# Altium PCB hat_template 2021V3.PcbDoc (part 1 of 2)
Units mm, origin at the board's own origin, x right, y up, seen from the top; angles counter-clockwise.
Board outline 64 x 85 mm, 4 copper layers (Top Side, Ground Plane, Power Plane, Bottom Side), stack 0.844 mm thick; 109 components, 93 nets, 378 pads, 126 vias.
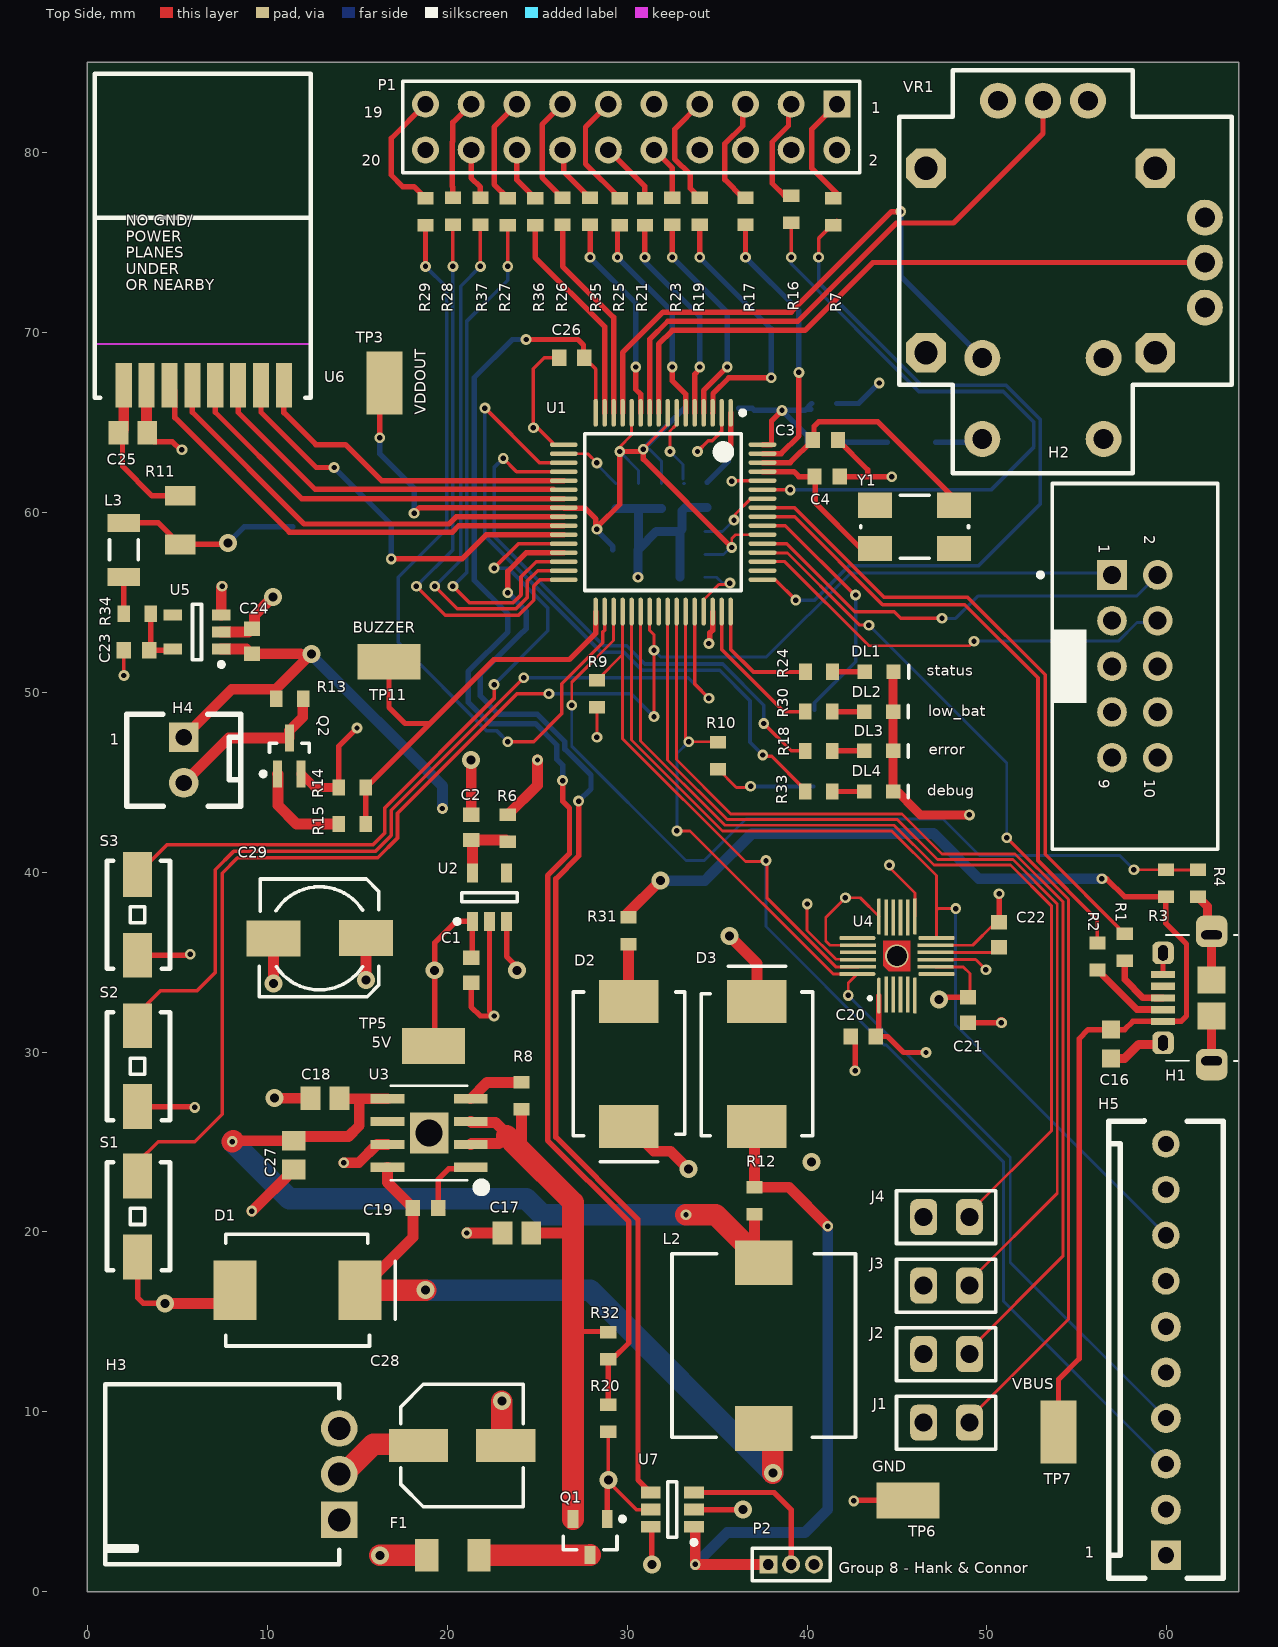
[diagram p0: Top Side view]
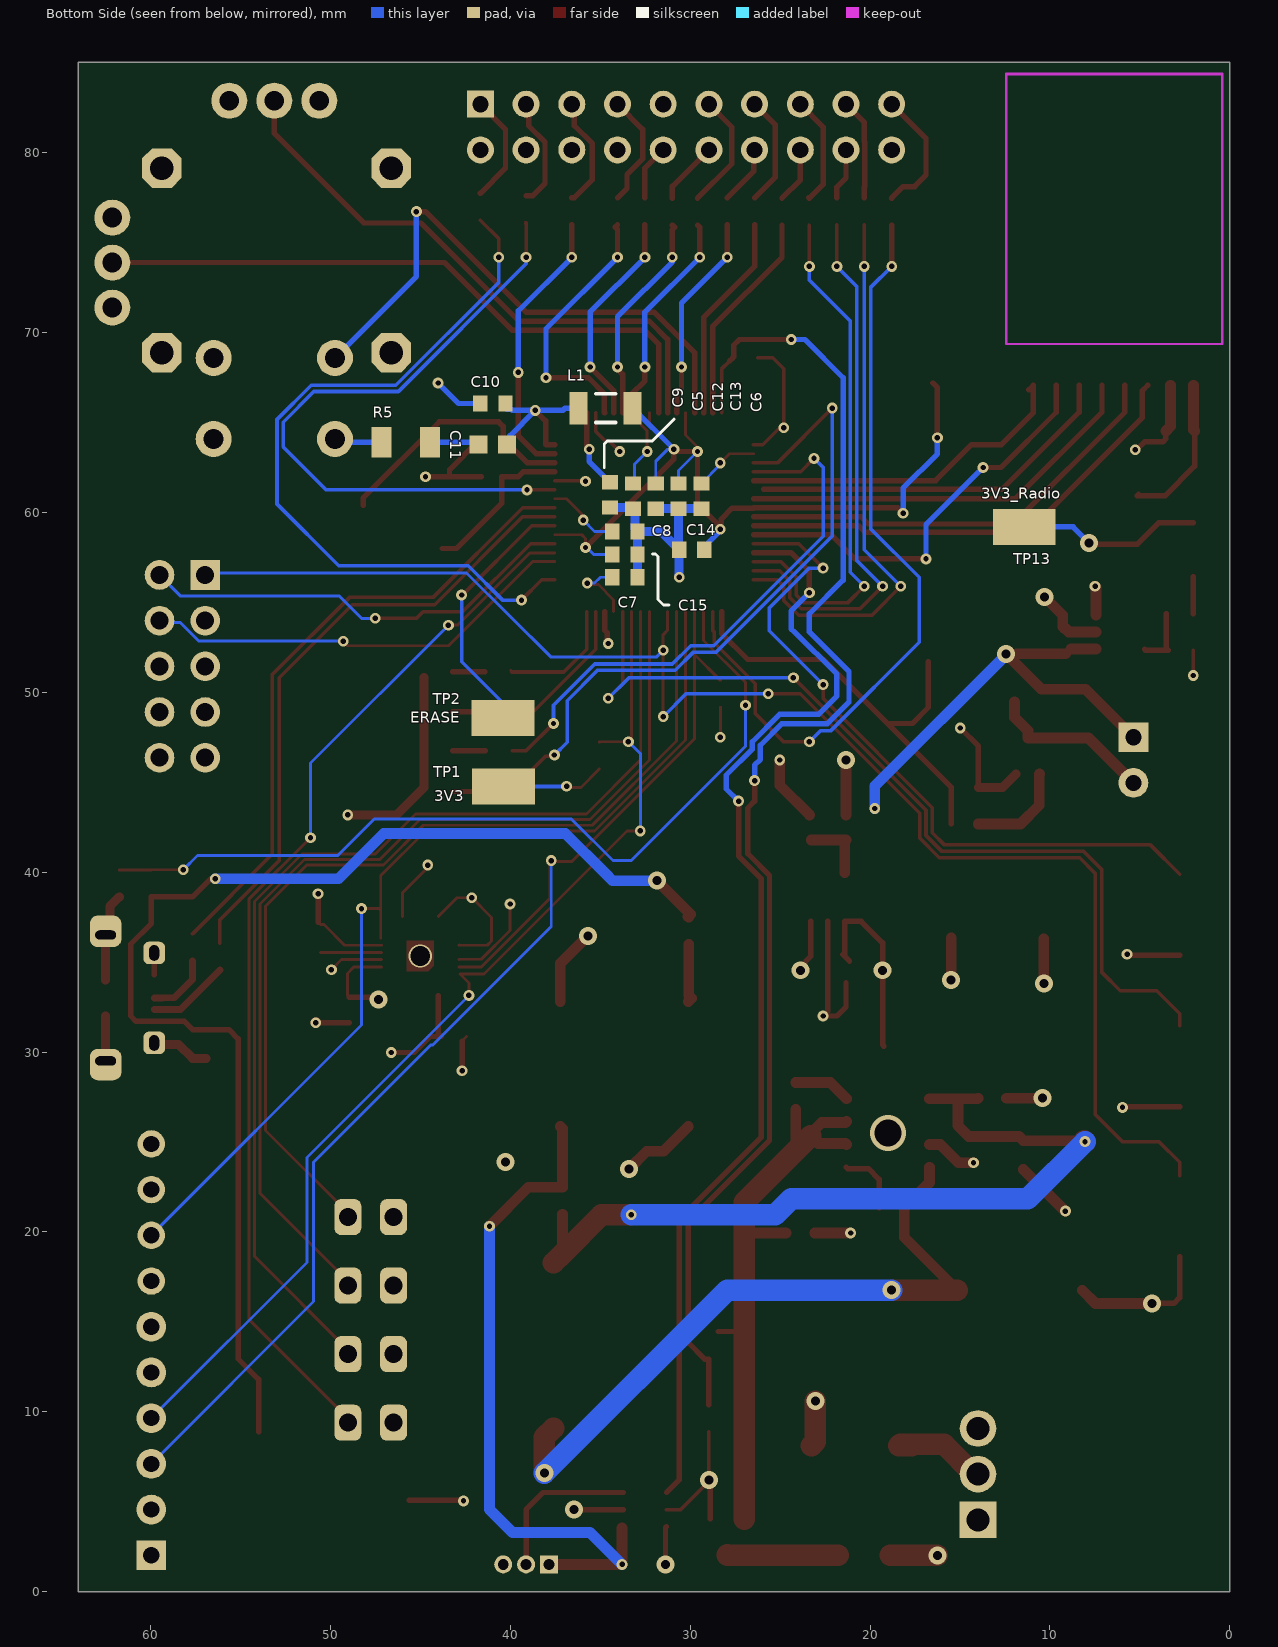
[diagram p1: Bottom Side view, seen from below]
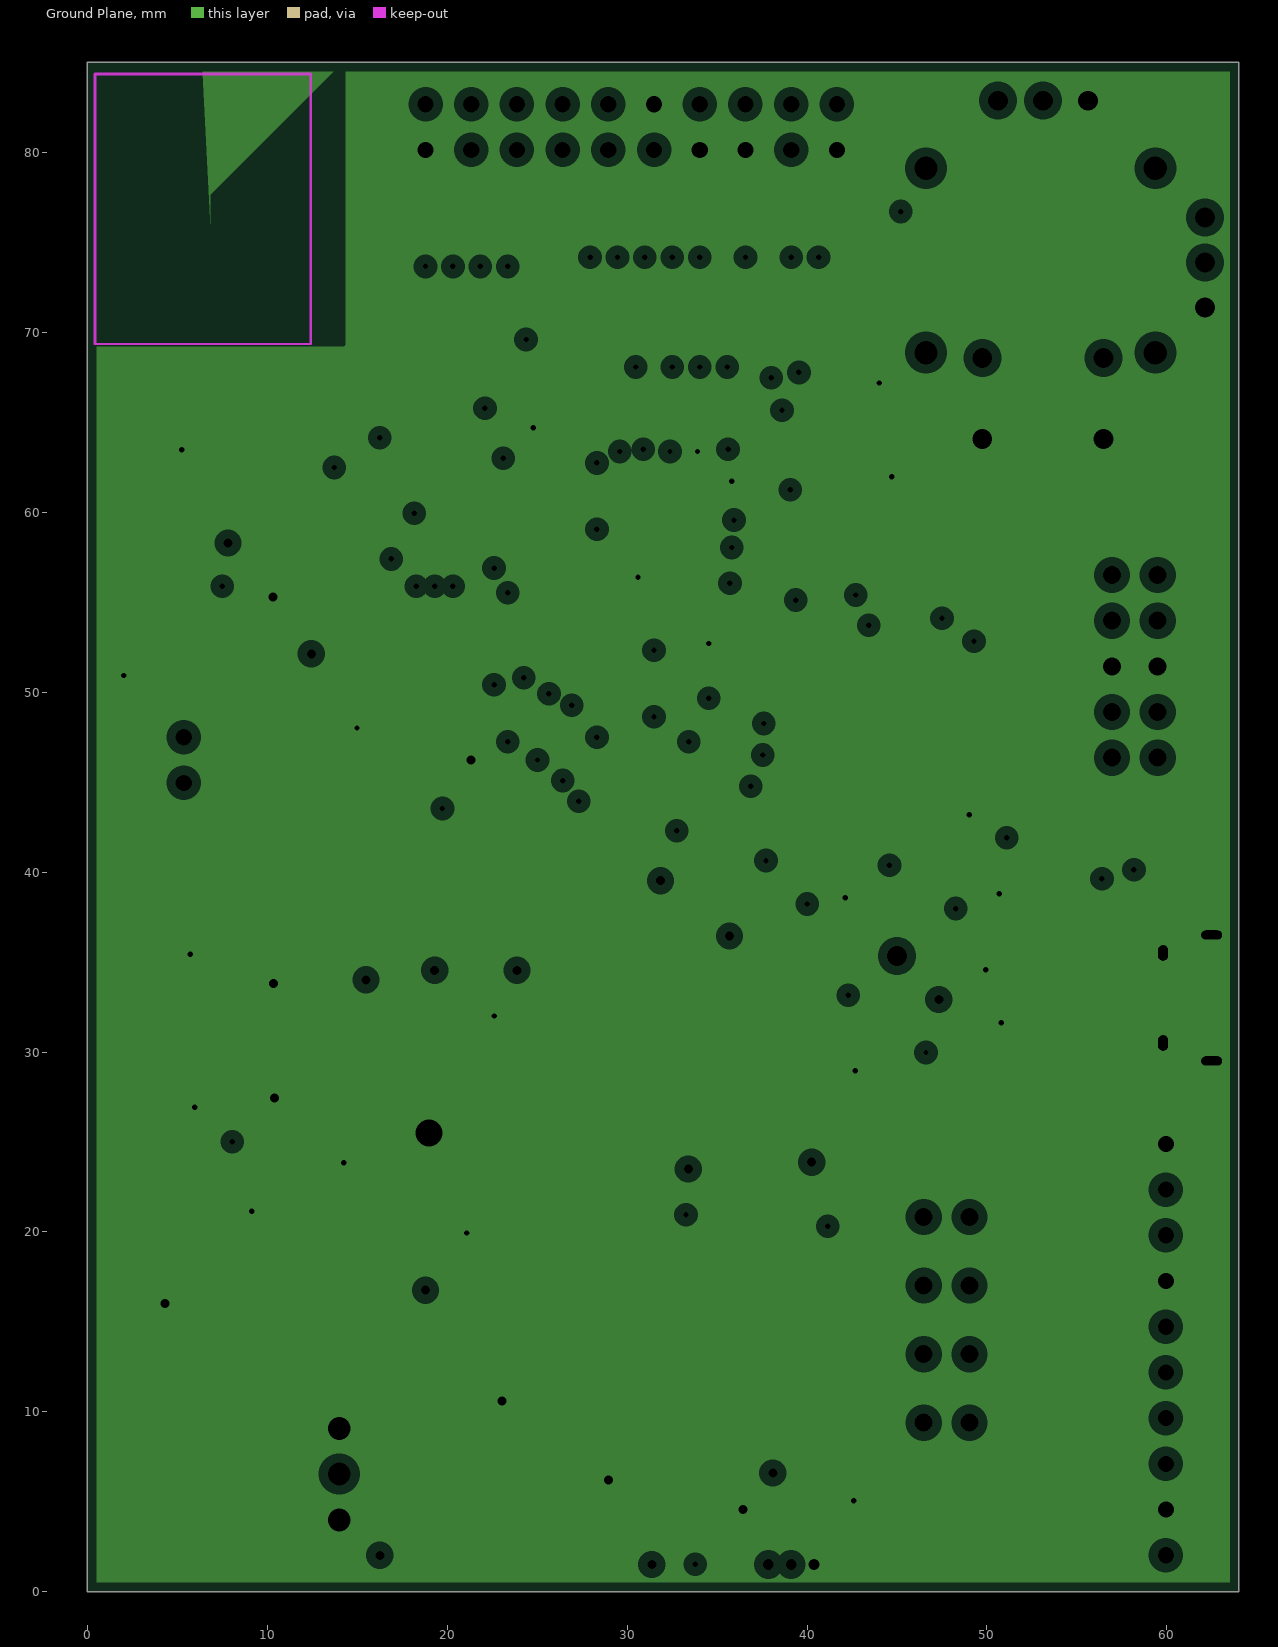
[diagram p2: Ground Plane, clearances drawn from the general rule]
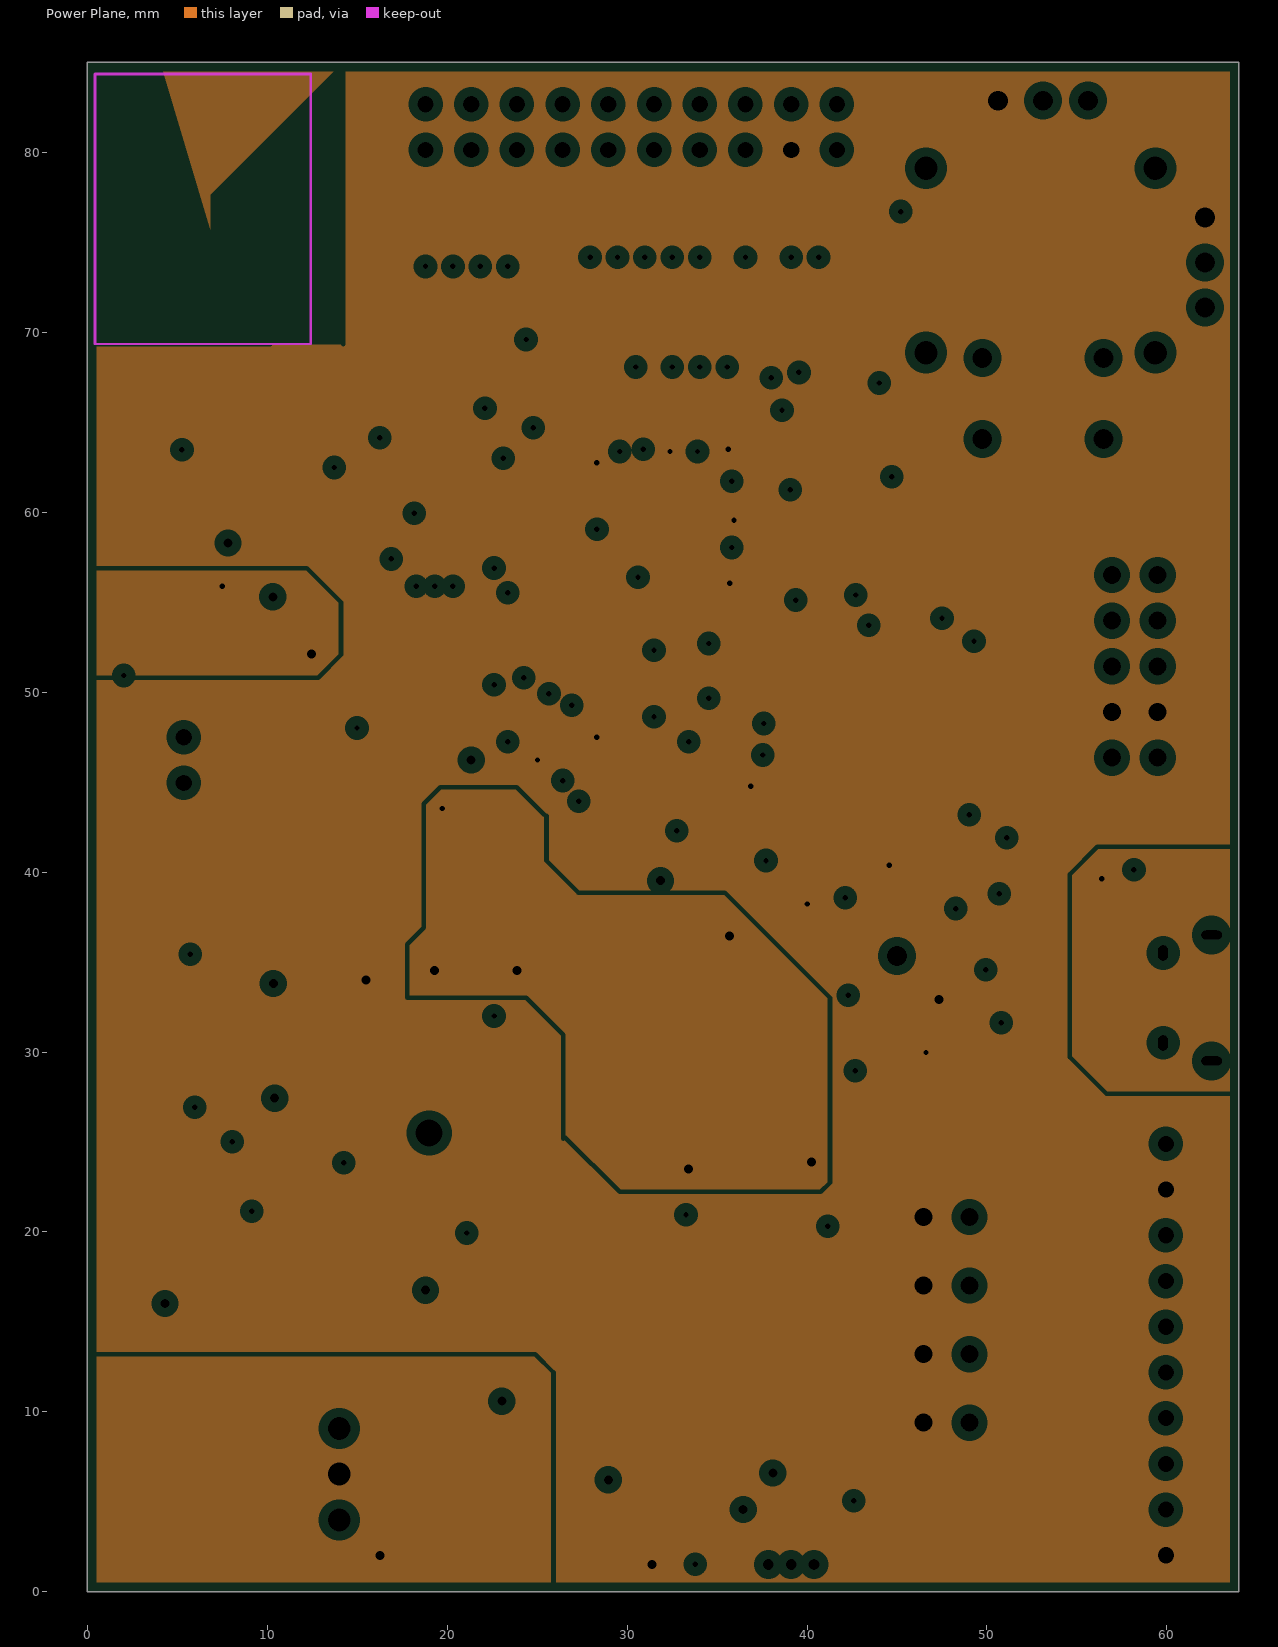
[diagram p3: Power Plane, clearances drawn from the general rule]

## Layer stack, top to bottom
Top Solder: solder mask 0.0102, Solder Resist, Dk 3.5
Top Side: signal copper 0.0356
Dielectric 1: core 0.32, FR-4, Dk 4.8
Ground Plane: plane copper 0.036, net GND
Dielectric 3: prepreg 0.127, Dk 4.2
Power Plane: plane copper 0.036, net (Multiple Nets)
Dielectric 4: core 0.254, Dk 4.2
Bottom Side: signal copper 0.0356
Bottom Solder: solder mask 0.0102, Solder Resist, Dk 3.5

## Board outline
0,85 64,85 64,0 0,0 0,85

## Design rules (kind name [scope] priority, off if disabled: settings)
BoardOutlineClearance [All] p1: gap=0.5 ignorepadtopadclearanceinfootprint=FALSE
Clearance Min_Clearance_Circuit_Labs [All] p1: gap=0.15 ignorepadtopadclearanceinfootprint=FALSE except(0: Arc-Hole Track-Hole SMDPad-Hole THPad-Hole Via-Hole Fill-Hole Poly-Hole Region-Hole Text-Hole)
DiffPairsRouting [All] p1: maxlimit=0.254 minlimit=0.254 mostfreqgap=0.254 toplayer_minwidth=0.381 toplayer_maxwidth=0.381 toplayer_prefwidth=0.381 bottomlayer_minwidth=0.381 bottomlayer_maxwidth=0.381 bottomlayer_prefwidth=0.381 maxuncoupledlength=12.7
FanoutControl Fanout_BGA [IsBGA] p1 off: bgadir=Out bgaviamode=Centered fanoutstyle=Auto fanoutdirection=Alternating viagrid=0.025 // Fanout_BGA (Default Rule)
HoleSize [All] p1: absolutevalues=TRUE maxlimit=10 minlimit=0.3 maxpercent=80.000 minpercent=20.000
MinimumAnnularRing [All] p1: minimumring=0.1
MinimumSolderMaskSliver [All] p1: minsoldermaskwidth=0.1
NetAntennae [All] p1: netantennaetolerance=1
PasteMaskExpansion [All] p1 off: expansion=0.2
PlaneClearance [All] p1: clearance=0.508
PlaneConnect [All] p1: planeconnectstyle=Relief reliefexpansion=0.508 reliefentries=4 reliefconductorwidth=0.254 reliefairgap=0.254
PolygonConnect [All] p1: connectstyle=Relief reliefconductorwidth=0.254 reliefentries=4 polygonreliefangle="90 Angle" airgapwidth=0.254
RoutingVias [All] p1: holewidth=0.5 width=1 viastyle="Through Hole" minholewidth=0.3 minwidth=0.6 maxholewidth=1 maxwidth=2
SMDNeckDown [All] p1 off: percent=50.000
SMDToCorner [All] p1: distance=98425
SMDToPlane [All] p1: distance=1968504
SilkToSolderMaskClearance SilkscreenOverComponentPads [IsPad] p1: minsilkscreentomaskgap=0.254 clearancetoexposedcopper=TRUE
SolderMaskExpansion [All] p1: expansion=0.102
ViasUnderSMD [All] p1: allowed=FALSE
Width [All] p1: maxlimit=2 minlimit=0.15 preferedwidth=0.3
21 further rules are at their usual default settings.

## Classes and differential pairs
component class Radio: C23 C24 C25 J1 J2 J3 J4 L3 R11 R34 TP13 U5 U6
component class Power: C17 C18 C19 C26 C27 C28 D1 D2 D3 F1 H3 L2 Q1 R8 R12 R20 R31 R32 U3
component class MCU: C1 C2 C3 C4 C5 C6 C7 C8 C9 C10 C11 C12 C13 C14 C15 C16 C29 DL1 DL2 DL3 DL4 H1 H2 L1 P1 R1 R2 R3 R4 R5 R6 R7 R9 R10 R16 R17 R18 R19 R21 R23 R24 R25 R26 R27 R28 R29 R30 R33 R35 R36 R37 S1 S2 S3 TP1 TP2 TP3 TP5 TP6 TP7 U1 U2 Y1
component class joystick: VR1
component class IMU: C20 C21 C22 H5 U4
component class buzzer: H4 P2 Q2 R13 R14 R15 TP11 U7
differential pair D: +D_P -D_N

## Components (designator, comment, footprint, x,y, rotation, side; value= is the part's Value field where it differs from the comment)
C1 "1uF" CAPC1608L 21.336,34.544 r90 top
C2 "1uF" CAPC1608L 21.336,42.48 r270 top
C3 "27pF" CAPC1608L 41.021,64.008 r180 top
C4 "27pF" CAPC1608L 41.111,61.976 r180 top
C5 "100nF" CAPC1608L 33.179,60.898 r90 bottom
C6 "100nF" CAPC1608L 29.369,60.898 r90 bottom
C7 "100nF" CAPC1608L 33.625,56.388 r0 bottom
C8 "100nF" CAPC1608L 33.625,58.928 r0 bottom
C9 "100nF" CAPC1608L 34.449,60.96 r90 bottom
C10 "100nF" CAPC1608L 40.959,66.04 r180 bottom
C11 "4.7uF" CAPC1608N 40.969,63.754 r180 bottom
C12 "100nF" CAPC1608L 31.909,60.898 r270 bottom
C13 "100nF" CAPC1608L 30.639,60.898 r270 bottom
C14 "100nF" CAPC1608L 29.91,57.912 r0 bottom
C15 "100nF" CAPC1608L 33.625,57.658 r180 bottom
C16 "4.7uF" CAPC1608N 56.896,30.442 r90 top
C17 "10uF" CAPC2012L 23.876,19.939 r0 top
C18 "33uF" CAPC2012L 13.208,27.432 r0 top
C19 "100nF" CAPC1608L 18.796,21.336 r180 top
C20 "100nF" CAPC1608L 43.118,30.861 r180 top
C21 "10nF" CAPC1608L 48.946,32.334 r270 top
C22 "100nF" CAPC1608L 50.673,36.514 r90 top
C23 "1uF" CAPC1608L 2.732,52.324 r0 top
C24 "1uF" CAPC1608L 9.144,52.832 r270 top
C25 "10uF" CAPC2012L 2.527,64.414 r180 top
C26 "1uF" CAPC1608L 26.924,68.58 r0 top
C27 "33uF" CAPC2012L 11.481,24.27 r90 top
C28 "100µF/25V" CAPAE6666X77M 20.828,8.128 r0 top
C29 "100uF/16V" NICH-1 12.903,36.322 r0 top
D1 "VS-30BQ015-M3/9AT" SMC 11.684,16.764 r0 top
D2 "VS-30BQ015-M3/9AT" SMC 30.099,29.337 r270 top
D3 "VS-30BQ015-M3/9AT" SMC 37.211,29.337 r90 top
DL1 "Bright Green" WL-SMCW0603 44.805,51.13 r180 top
DL2 "Yellow" WL-SMCW0603 44.78,48.92 r180 top
DL3 "Red" WL-SMCW0603 44.78,46.736 r180 top
DL4 "Blue" WL-SMCW0603 44.78,44.475 r180 top
F1 "5A" RESC3216N 20.32,2.032 r0 top
H1 "JS_USB_MICRO_B" FCI_USB_10118194-0001LF 63.934,33.004 r90 top
H2 "Header 5X2 Vert" IDC2.54-V10D 58.217,51.435 r270 top
H3 "Battery_HEADER_3pin" BATT_HEADER_3POS 14,6.54 r90 top
H4 "2 Pin Molex KK HDR" MOLEX_KK_2_HDR 5.359,47.498 r270 top
H5 "10 Pin Molex KK Hdr" MOLEX_KK_10_HDR 59.944,2.032 r90 top
J1 "100Mil Jumper" JMP2.54 49.026,9.398 r180 top
J2 "100Mil Jumper" JMP2.54 49.026,13.208 r180 top
J3 "100Mil Jumper" JMP2.54 49.026,17.018 r180 top
J4 "100Mil Jumper" JMP2.54 49.026,20.828 r180 top
L1 "1A max, Idc 0.3R," INDC3216L 34.695,65.786 r180 bottom
L2 "IND 5.2UH 6A" INDUCTOR5u2 37.592,13.688 r90 top
L3 "1A max, Idc 0.3R," INDC3216L 2.032,57.912 r90 top
P1 "Header 10X2" HDR2X10 41.656,82.677 r180 top
P2 "LED Strip" MHDR1X3 37.846,1.524 r0 top
Q1 "SSM3J328R,LF" SOT23_L 27.94,3.048 r270 top
Q2 "BC817W" SOT323_M 11.227,46.457 r90 top
R1 "27R" RESC1608L 57.658,35.814 r90 top
R2 "27R" RESC1608L 56.134,35.306 r90 top
R3 "27K" RESC1608L 59.944,39.37 r270 top
R4 "47K" RESC1608L 61.722,39.37 r90 top
R5 "1R" RESC3216L 45.8,63.881 r180 bottom
R6 "0R" RESC1608L 23.368,42.43 r90 top
R7 "Value: 750R" RESC1608L 41.453,76.696 r90 top value=750R
R8 "100K" RESC1608L 24.13,27.559 r90 top
R9 "4K7" RESC1608L 28.321,49.911 r270 top
R10 "4K7" RESC1608L 35.052,46.47 r270 top
R11 "1R" RESC3216L 5.156,59.563 r270 top
R12 "0R" RESC1608L 37.084,21.729 r90 top
R13 "10K" RESC1608L 11.252,49.632 r180 top
R14 "10K" RESC1608L 14.732,44.704 r0 top
R15 "10R" RESC1608L 14.732,42.672 r180 top
R16 "Value: 750R" RESC1608L 39.116,76.847 r90 top value=750R
R17 "Value: 750R" RESC1608L 36.576,76.72 r90 top value=750R
R18 "1K" RESC1608L 40.64,46.736 r0 top
R19 "=Value" RESC1608L 34.036,76.72 r90 top
R20 "56K" RESC1608L 28.956,9.652 r90 top
R21 "Value: 750R" RESC1608L 30.988,76.708 r270 top value=750R
R23 "Value: 750R" RESC1608L 32.512,76.72 r270 top value=750R
R24 "1K" RESC1608L 40.665,51.13 r0 top
R25 "Value: 750R" RESC1608L 29.591,76.708 r90 top value=750R
R26 "Value: 750R" RESC1608L 26.416,76.72 r90 top value=750R
R27 "Value: 750R" RESC1608L 23.368,76.708 r90 top value=750R
R28 "Value: 750R" RESC1608L 20.32,76.72 r90 top value=750R
R29 "Value: 750R" RESC1608L 18.796,76.708 r90 top value=750R
R30 "1K" RESC1608L 40.64,48.92 r0 top
R31 "0R" RESC1608L 30.074,36.742 r270 top
R32 "100K" RESC1608L 28.956,13.683 r90 top
R33 "1K" RESC1608L 40.64,44.475 r0 top
R34 "0R" RESC1608L 2.782,54.356 r180 top
R35 "Value: 750R" RESC1608L 27.94,76.72 r270 top value=750R
R36 "Value: 750R" RESC1608L 24.892,76.708 r270 top value=750R
R37 "Value: 750R" RESC1608L 21.844,76.72 r270 top value=750R
S1 "EVQPNF05M" EVQPNF05M 2.794,20.864 r270 top
S2 "EVQPNF05M" EVQPNF05M 2.794,29.21 r270 top
S3 "EVQPNF05M" EVQPNF05M 2.794,37.628 r270 top
TP1 "3V3" TP_1206 40.361,44.755 r180 bottom value=TP
TP2 "Erase" TP_1206 40.411,48.565 r180 bottom value=TP
TP3 "VDDOUT" TP_1206 16.51,67.183 r90 top value=TP
TP5 "5V" TP_1206 19.228,30.328 r0 top value=TP
TP6 "GND" TP_1206 45.618,5.08 r0 top value=TP
TP7 "VBUS" TP_1206 53.975,8.89 r90 top value=TP
TP11 "BUZZER" TP_1206 16.764,51.689 r0 top value=TP
TP13 "3V3_RADIO" TP_1206 11.43,59.182 r180 bottom value=TP
U1 "ATSAM4S8BA-ANR" LQFP64_L 32,60 r270 top locked
U2 "CAT6219-330TDGT3" SOT95P280X145-5N 22.352,38.608 r90 top
U3 "ADP2302ARDZ-5.0 BUCK" RD_8_1 19,25.5 r180 top locked value=Value
U4 "MPU-9250" QUAD24 43.993,33.985 r90 top locked
U5 "CAT6219-330TDGT3" SOT95P280X145-5N 6.096,53.34 r180 top
U6 "nRF24 SMD" NRF24 0.423,66.356 r0 top
U7 "SN74LVC1T45" SOT23-6_N 32.512,4.572 r180 top
VR1 "Joystick 10k with Sw" Joystick_Sw 53.11,82.871 r90 top
Y1 "12MHz" 6.0X3.5-4 45.974,59.182 r0 top

## Footprints (in the part's own frame and the unit in brackets; to place one, negate y for a bottom-side part, rotate by r counter-clockwise, add the part's x,y. Pads: shape width x height; smd on the part's side, far side on the other; paste and mask are expansions set on the pad)
6.0X3.5-4 [mm] "4 SMD 6.0X3.5 mm No Lead Crystal"
  rect 1.9x1.4 smd: 1(-2.2,-1.2) 2(2.2,-1.2) 3(2.2,1.2) 4(-2.2,1.2)
  silkscreen extent -3,-1.75 3,1.75, body extent -3,-1.75 3,1.75, height 1.2
BATT_HEADER_3POS [mil]
  rect 80x80 hole 50: 1(-100,0)
  round 80 hole 50: 2(0,0) 3(100,0)
  silkscreen extent -197,0 197,512
CAPAE6666X77M [mm] "Aluminum Electrolytic Capacitor, Body 6.60x6.60x7.70mm, IPC Low Density"
  rect 3.3x1.85 smd: 1(2.425,0) 2(-2.425,0)
  silkscreen extent -3.4,-3.4 3.4,3.4, body extent -3.4,-3.4 3.4,3.4, height 7.7
CAPC1608L [mm] "Chip Capacitor, Body 1.6x0.8mm, IPC High Density"
  rect 0.8x0.9 smd: 1(-0.7,0) 2(0.7,0)
  body extent -0.87,-0.48 0.87,0.48, height 0.85
CAPC1608N [mm] "Chip Capacitor, Body 1.6x0.8mm, IPC Medium Density"
  rect 1x1 smd: 1(-0.8,0) 2(0.8,0)
  body extent -0.87,-0.48 0.87,0.48, height 0.85
CAPC2012L [mm] "Chip Capacitor, Body 2.0x1.3mm, IPC High Density"
  rect 1.1x1.3 smd: 1(-0.8,0) 2(0.8,0)
  body extent -1.1,-0.72 1.1,0.72, height 1.1
EVQPNF05M [mm] "Panansonic light touch SMD push button switch"
  rect 2.5x1.6 smd: 1(-2.25,0) 2(2.25,0)
  silkscreen extent -3,-1.7 3,1.8, body extent -3,-1.7 3,1.8, height 5
FCI_USB_10118194-0001LF [mm] "Micro USB B Type Receptacle"
  rect 0.4x1.35 smd mask+0.07: 1(-1.3,4.15) 2(-0.65,4.15) 3(0,4.15) 4(0.65,4.15) 5(1.3,4.15)
  rrect50% 1.75x1.75 hole 0.5 slot 1.15 at 90 deg copper offset -0.2,0 paste+0 mask+0.1: 6(-3.5,1.45)
  rrect50% 1.25x1.2 hole 0.55 slot 0.85 at 0 deg: 6(-2.5,4.15) 6(2.5,4.15)
  rect 1.5x1.55 smd: 6(-1,1.45) 6(1,1.45)
  rrect50% 1.75x1.75 hole 0.5 slot 1.15 at 90 deg copper offset 0.2,0 paste+0 mask+0.1: 6(3.5,1.45)
  silkscreen extent -3.5,0 3.5,4
HDR2X10 [mm] "Connector; Header; 10x2 Position"
  rect 1.5x1.5 hole 0.9: 1(0,0)
  round 1.5 hole 0.9: 2(0,2.54) 3(2.54,0) 4(2.54,2.54) 5(5.08,0) 6(5.08,2.54) 7(7.62,0) 8(7.62,2.54) 9(10.16,0) 10(10.16,2.54) 11(12.7,0) 12(12.7,2.54) 13(15.24,0) 14(15.24,2.54) 15(17.78,0) 16(17.78,2.54) 17(20.32,0) 18(20.32,2.54) 19(22.86,0) 20(22.86,2.54)
  silkscreen extent -1.27,-1.27 24.13,3.81
IDC2.54-V10D [mm] "Connector; IDC, Low Profile Male Header, Thru-Hole; 10 Position; Vertical; Pitch 2.54 mm; Body 20.32 x 9.2 x 9.45 mm (LxWxH)"
  rect 1.65x1.65 hole 1: 1(-5.08,-1.27)
  round 1.65 hole 1: 2(-5.08,1.27) 3(-2.54,-1.27) 4(-2.54,1.27) 5(0,-1.27) 6(0,1.27) 7(2.54,-1.27) 8(2.54,1.27) 9(5.08,-1.27) 10(5.08,1.27)
  silkscreen extent -10.16,-5.37 10.16,4.6, body extent -10.16,-4.6 10.16,4.6, height 9.45
INDC3216L [mm] "Chip Inductor, Body 3.2x1.6mm, IPC High Density"
  rect 1x1.8 smd: 1(-1.5,0) 2(1.5,0)
  silkscreen extent -0.55,-0.8 0.55,0.8, body extent -1.75,-0.95 1.75,0.95, height 1.9
INDUCTOR5u2 [mm]
  rect 2.5x3.2 smd: 1(-4.6,0) 2(4.6,0)
  silkscreen extent -5.1,-5.1 5.1,5.1
JMP2.54 [mm] "Jumper Change over 2.54mm"
  rrect50% 1.5x2 hole 1: 1(0,0) 2(2.544,0)
  silkscreen extent -1.47,-1.47 4.05,1.47, body extent -1.43,-1.43 4.05,1.43, height 8.45
Joystick_Sw [mm]
  round 2 hole 1.1: 1(0,2.5) 2(0,0) 3(0,-2.5) 4(-6.5,-9) 5(-9,-9) 6(-11.5,-9) 7(-14.3,-3.37) 8(-18.8,-3.37) 9(-18.8,3.37) 10(-14.3,3.37)
  oct 2.2x2.2 hole 1.3: 11(-14,-6.25) 12(-3.75,-6.25) 13(-14,6.5) 14(-3.75,6.5)
  silkscreen extent -20.7,-10.5 1.7,8
LQFP64_L [mm] "Thin QFP, 64-Leads, Body 10x10mm, Pitch 0.5mm, IPC High Density"
  oval 1.55x0.25 smd mask+0.07: 1(-5.525,3.75) 2(-5.525,3.25) 3(-5.525,2.75) 4(-5.525,2.25) 5(-5.525,1.75) 6(-5.525,1.25) 7(-5.525,0.75) 8(-5.525,0.25) 9(-5.525,-0.25) 10(-5.525,-0.75) 11(-5.525,-1.25) 12(-5.525,-1.75) 13(-5.525,-2.25) 14(-5.525,-2.75) 15(-5.525,-3.25) 16(-5.525,-3.75) 33(5.525,-3.75) 34(5.525,-3.25) 35(5.525,-2.75) 36(5.525,-2.25) 37(5.525,-1.75) 38(5.525,-1.25) 39(5.525,-0.75) 40(5.525,-0.25) 41(5.525,0.25) 42(5.525,0.75) 43(5.525,1.25) 44(5.525,1.75) 45(5.525,2.25) 46(5.525,2.75) 47(5.525,3.25) 48(5.525,3.75)
  oval 0.25x1.55 smd mask+0.07: 17(-3.75,-5.525) 18(-3.25,-5.525) 19(-2.75,-5.525) 20(-2.25,-5.525) 21(-1.75,-5.525) 22(-1.25,-5.525) 23(-0.75,-5.525) 24(-0.25,-5.525) 25(0.25,-5.525) 26(0.75,-5.525) 27(1.25,-5.525) 28(1.75,-5.525) 29(2.25,-5.525) 30(2.75,-5.525) 31(3.25,-5.525) 32(3.75,-5.525) 49(3.75,5.525) 50(3.25,5.525) 51(2.75,5.525) 52(2.25,5.525) 53(1.75,5.525) 54(1.25,5.525) 55(0.75,5.525) 56(0.25,5.525) 57(-0.25,5.525) 58(-0.75,5.525) 59(-1.25,5.525) 60(-1.75,5.525) 61(-2.25,5.525) 62(-2.75,5.525) 63(-3.25,5.525) 64(-3.75,5.525)
  silkscreen extent -5.65,-4.35 4.35,4.55, body extent -5,-5 5,5, height 1.6
MHDR1X3 [mm] "Connector; Header; 3 Position"
  rect 1x1 hole 0.6: 1(0,0)
  round 1 hole 0.6: 2(1.27,0) 3(2.54,0)
  silkscreen extent -0.9,-0.9 3.44,0.9
MOLEX_KK_2_HDR [mil] "MOLEX_KK_2_HDR"
  rect 65x65 hole 35.43: 1(0,0)
  round 65 hole 35.43: 2(100,0)
  silkscreen extent -50,-125 152,125, body extent -44,-121 146,119, height 630
MOLEX_KK_10_HDR [mil] "MOLEX_KK_10_HDR"
  rect 65x65 hole 35.43: 1(0,0)
  round 65 hole 35.43: 2(100,0) 3(200,0) 4(300,0) 5(400,0) 6(500,0)
  round 60 hole 35.43: 7(600,0) 8(700,0) 9(800,0) 10(900,0)
  silkscreen extent -50,-125 951,125, body extent -44,-120 944,120, height 630
NICH-1 [mm] "Electrolytic capacitor"
  rect 3x2 smd: 1(-2.561,-0.022) 2(2.584,0.011)
  silkscreen extent -3.34,-3.25 3.3,3.3, body extent -3.2,-3.2 3.2,3.2, height 5.3
NRF24 [mm]
  rect 0.9x2.5 smd: 1(1.6,0.7) 2(2.871,0.7) 3(4.143,0.7) 4(5.414,0.7) 5(6.686,0.7) 6(7.957,0.7) 7(9.229,0.7) 8(10.5,0.7)
  Keep-Out Layer lines w0.1: 0,3 12,3
  Keep-Out Layer lines w0.15: 0,3 0,18 12,18 12,3
  silkscreen extent 0,0 12,18
QUAD24 [mm]
  oval 2x0.2 smd paste+0.02 mask+0.015: 1(-0.85,0)
  rect 2x0.2 smd paste+0.02 mask+0.015: 2(-0.8,-0.4) 3(-0.8,-0.8) 4(-0.8,-1.2) 5(-0.8,-1.6) 14(3.5,-1.6) 15(3.5,-1.2) 16(3.5,-0.8) 17(3.5,-0.4)
  rrect50% 2x0.2 smd paste+0.02 mask+0.015: 6(-0.85,-2) 13(3.55,-2) 18(3.55,0)
  rrect50% 0.2x2 smd paste+0.02 mask+0.015: 7(0.35,-3.2) 12(2.35,-3.2) 19(2.35,1.2) 24(0.35,1.2)
  rect 0.2x2 smd paste+0.02 mask+0.015: 8(0.75,-3.15) 9(1.15,-3.15) 10(1.55,-3.15) 11(1.95,-3.15) 20(1.95,1.15) 21(1.55,1.15) 22(1.15,1.15) 23(0.75,1.15)
  Top Side region: 0.5,-1.75 0.5,-0.55 0.8,-0.25 2.2,-0.25 2.2,-1.75
  silkscreen extent -1.05,0.45 -0.95,0.55
RD_8_1 [mil]
  rect 74x20 smd paste+0 mask+0: 1(-91,75) 2(-91,25) 3(-91,-25) 4(-91,-75) 5(91,-75) 6(91,-25) 7(91,25) 8(91,75)
  rect 84.65x90 smd paste-44.5 mask+0: EPAD(0,0)
  silkscreen extent -118,-104 84,123, body extent 0,0 10,10, height 10
RESC1608L [mm] "Chip Resistor, Body 1.6x0.8mm, IPC High Density"
  rect 0.7x0.9 smd: 1(-0.75,0) 2(0.75,0)
  body extent -0.85,-0.48 0.85,0.48, height 0.9
RESC3216L [mm] "Chip Resistor, Body 3.1x1.6mm, IPC High Density"
  rect 1.1x1.7 smd: 1(-1.35,0) 2(1.35,0)
  body extent -1.68,-0.87 1.68,0.87, height 2.54
RESC3216N [mm] "Chip Resistor, Body 3.2x1.6mm, IPC Medium Density"
  rect 1.3x1.8 smd: 1(-1.45,0) 2(1.45,0)
  body extent -1.68,-0.87 1.68,0.87, height 0.71
SMC [mm] "DO-214-AB/SMC; 2 C-Bend Leads; Body 7.9 x 5.9 mm, inc. leads (LxW)"
  rect 2.4x3.3 smd: 1(-3.475,0) 2(3.475,0)
  silkscreen extent -4,-3.1 5.43,3.1
SOT23-6_N [mm]
  rect 1.1x0.65 smd: 1(-1.2,0.95) 2(-1.2,0) 3(-1.2,-0.95) 4(1.2,-0.95) 5(1.2,0) 6(1.2,0.95)
  silkscreen extent -1.33,-1.55 0.25,1.95, body extent -0.9,-1.55 0.9,1.55, height 1.45
SOT23_L [mm] "SOT23, 3-Leads, Body 2.9x1.3mm, Pitch 0.95mm, Lead Span 2.3mm, IPC High Density"
  rect 1x0.6 smd: 1(-1,0.95) 2(-1,-0.95) 3(1,0)
  silkscreen extent -1.12,-1.5 0.7,1.93, body extent -0.7,-1.5 0.7,1.5, height 1.1
SOT95P280X145-5N [mm] "SOT23, 5-Leads, Body 2.90x2.80mm, Pitch 0.95mm, IPC Medium Density"
  rect 1.05x0.6 smd: 1(-1.35,0.95) 2(-1.35,0) 3(-1.35,-0.95) 4(1.35,-0.95) 5(1.35,0.95)
  silkscreen extent -1.47,-1.55 0.25,1.92, body extent -0.87,-1.52 0.87,1.53, height 1.45
SOT323_M [mm] "SOT323, 3-Leads, Body 2.0x1.3mm, Pitch 0.65mm, Lead Span 2.1mm, IPC Low Density"
  rect 1.5x0.5 smd: 1(-1,0.65) 2(-1,-0.65) 3(1,0)
  silkscreen extent -1.12,-1.1 0.7,1.57, body extent -0.7,-1.1 0.7,1.1, height 1.1
TP_1206 [mm] "Test Point Pad"
  rect 3.5x2 smd: 1(0,0)
  body extent -1.62,-0.85 1.63,0.8, height 2
WL-SMCW0603 [mm] "2.4 x 0.8 x 0.7mm LED"
  rect 0.8x0.8 smd: 1(0,0) 2(1.6,0)
  silkscreen extent -0.85,-0.35 -0.85,0.35

## Part data
C1 C2 C23 C24 C26: library part CC_1uF_0603, "CAP CER 1uF Y5V -20% +80% 16V 0603", Max Voltage=16V, Code_IPC="1608 [0603]", PackageReference=0603, Storage Location="PCB Assembly WS", Supplier="ECE Dept"
C3 C4: library part CC_27pF_0603, "CAP CER 27pF NPO/COG +-5% 50V 0603", Code_IPC="1608 [0603]", PackageReference=0603, Storage Location="PCB Assembly WS", Supplier="ECE Dept"
C5 C6 C7 C8 C9 C10 C12 C13 C14 C15 C19 C20 C22: library part CC_100nF_0603, "CAP CER 100nF X7R +-10% 50V 0603", Code_IPC="1608 [0603]", PackageReference=0603, Storage Location="PCB Assembly WS", Supplier="ECE Dept"
C11 C16: library part CC_4.7uF_0603, "CAP CER 4.7uF X5R +-20%  10V 0603", Max Voltage=10V, Code_IPC=2012[0805], Note="Footprint corresponds to dimensions for bulk cassette packaging. This case size has tightened tolerances.", PackageReference=0805, Storage Location="PCB Assembly WS", Supplier="ECE Dept"
C17 C25: library part CC_10uF_16V_0805, "CAP CER 10uF X5R 16V 0805", Manufacturer="Samsung Electro-Mechanics", Manufacturer Part Number=CL21A106KOQNNWE, Max Voltage=16V, Operating Temperature="-55°C ~ 85°C", Package / Case="0805 (2012 Metric)", Ratings=-, Supplier Part Number 1=1276-2894-1-ND, Temperature Coefficient=X5R, Tolerance=±10%, Applications="General Purpose", Category=Capacitors, Code_IPC=2012[0805], ComponentLink1Description=http://www.samsungsem.com/kr/support/product-search/mlcc/CL21A106KOQNNWE.jsp, ComponentLink1URL=http://www.samsungsem.com/kr/support/product-search/mlcc/CL21A106KOQNNWE.jsp, Features=-, Height - Seated (Max)=-, Lead Spacing=-, Lead Style=-, Mounting Type="Surface Mount, MLCC", Note="Footprint corresponds to dimensions for bulk cassette packaging. This case size has tightened tolerances.", Notification="Current market demand for these product types have resulted in fluctuating and extending lead times. Lead times may differ.", PackageReference=0805, Packaging="Cut Tape (CT)", Part Status=Active, Pricing 1="1=0.35, 10=0.25, 100=0.1178, 500=0.08254, 1000=0.06831 (NZD)", RoHS="RoHS Compliant", Size / Dimension="0.079\" L x 0.049\" W (2.00mm x 1.25mm)", Stock 1=20000, Supplier 1=Digi-Key, Thickness (Max)="0.055\" (1.40mm)", Voltage - Rated=16V
C18 C27: library part CC_33uF_6V3_0805, "CAP CER 33uF X5R 6V3 0805", Manufacturer="TDK Corporation", Manufacturer Part Number=C2012X5R0J336M125AC, Operating Temperature="-55°C ~ 85°C", Package / Case="0805 (2012 Metric)", Ratings=-, Supplier Part Number 1=445-5986-1-ND, Temperature Coefficient=X5R, Tolerance=±20%, Voltage - Rated=6.3V, Applications="General Purpose", Category=Capacitors, ComponentLink1Description=https://product.tdk.com/info/en/catalog/datasheets/mlcc_commercial_general_en.pdf, ComponentLink1URL=https://product.tdk.com/info/en/catalog/datasheets/mlcc_commercial_general_en.pdf, Failure Rate=-, Features="Low ESL", Height - Seated (Max)=-, Lead Spacing=-, Lead Style=-, Mounting Type="Surface Mount, MLCC", Notification="Current market demand for these product types have resulted in fluctuating and extending lead times. Lead times may differ.", Packaging="Cut Tape (CT)", Part Status=Active, Pricing 1="1=1.65, 10=1.262, 100=0.9023, 500=0.6985, 1000=0.60149 (NZD)", RoHS="RoHS Compliant", Size / Dimension="0.079\" L x 0.049\" W (2.00mm x 1.25mm)", Stock 1=20000, Supplier 1=Digi-Key, Thickness (Max)="0.057\" (1.45mm)"
C21: library part CC_10nF_0603, "CAP CER 10nF X7R +-10% 50V 0603", Code_IPC="1608 [0603]", PackageReference=0603, Storage Location="PCB Assembly WS", Supplier="ECE Dept"
C28: library part CA_100uF_25V, "CAP ALUM 100UF 25V 20% SMD", Manufacturer=Nichicon, Manufacturer Part Number=UWT1E101MCL1GS, Operating Temperature="-55°C ~ 105°C", Package / Case="Radial, Can - SMD", Ripple Current=91mA, Supplier Part Number 1=493-2190-1-ND, Capacitance=100µF/25V, Height - Seated (Max)="0.303\" (7.70mm)", Mounting Type="Surface Mount", Size / Dimension="0.248\" Dia (6.30mm)", Supplier 1=Digi-Key
C29: library part CA_100uF_16V, "CAP ALUM 100uF 16V SMD", Manufacturer=Nichcon, Manufacturer PN=UWX1C101MCL1GB, Supplier Part Number 1=1870677, Storage Location="PCB Assembly WS", Supplier="ECE Dept", Supplier 1=Farnell, Supplier 2=Digi-Key, Supplier Part Number 2=493-2105-1-ND
D1 D2 D3: library part DS_VS-30BQ015-M3, "DIODE, SCHOTTKY, 3A, 15V, DO-214AB / SMC", Average Rectified Current=3A, Forward Voltage=350mV, Manufacturer="Vishay Semiconductors", Max Forward Surge Current (Ifsm)=650A, Max Reverse Voltage (DC)=15V, Peak Reverse Current=4mA, Supplier Part Number=VS-30BQ015-M3/9AT-ND, Supplier Part Number 1=VS-30BQ015-M3/9ATGIDKR-ND, ComponentLink1Description=https://datasheet.ciiva.com/36181/vs-30bq015-m3-9at-36181258.pdf, ComponentLink1URL=https://datasheet.ciiva.com/36181/vs-30bq015-m3-9at-36181258.pdf, Manufacturer Part Number=VS-30BQ015-M3/9AT, Supplier=Digi-Key, Supplier 1=Digi-Key, Supplier 2=Element14, Supplier Part Number 2=2628288
DL1: library part DL_150060VS75000, "LED Bright Green 40mcd 0603 SMD", Forward Current If=30, Forward Voltage=2, Manufacturer="WURTH ELEKTRONIK", Manufacturer Part Number=150060VS75000, Supplier Part Number 1=2322073, LED Colour="Bright Green", LED Mounting=SMD, Luminous Intensity=40, Storage Location="PCB Assembly WS", Supplier="ECE Dept", Supplier 1=Farnell, Viewing Angle=140°, Wavelength Typ=570
DL2: library part DL_150060YS75000, "LED Yellow 120mcd 0603 SMD", Forward Current If=30, Forward Voltage=2, Manufacturer="WURTH ELEKTRONIK", Manufacturer Part Number=150060YS75000, Supplier Part Number 1=2322074, LED Colour=Yellow, LED Mounting=SMD, Lens Shape=Rectangular, Luminous Intensity=120, Storage Location="PCB Assembly WS", Supplier="ECE Dept", Supplier 1=Farnell, Viewing Angle=140°, Wavelength Typ=590
DL3: library part DL_150060RS75000, "LED Red 250mcd 0603 SMD", Forward Current If=30, Forward Voltage=2, Manufacturer="WURTH ELEKTRONIK", Manufacturer Part Number=150060RS75000, Supplier Part Number 1=2322071, LED Colour=Red, LED Mounting=SMD, Lens Shape=Rectangular, Luminous Intensity=250, Storage Location="PCB Assembly WS", Supplier="ECE Dept", Supplier 1=Farnell, Viewing Angle=140°, Wavelength Typ=625
DL4: library part DL_150060BS75000, "LED Blue 270mcd 0603 SMD", Forward Current If=30, Forward Voltage=3.2, Manufacturer="WURTH ELEKTRONIK", Manufacturer Part Number=150060BS75000, Supplier Part Number 1=2322069, LED Colour=Blue, Luminous Intensity=270, Pricing="1=0.3844, 50=0.3252, 100=0.2957, 500=0.2365 (NZD)", Storage Location="PCB Assembly WS", Supplier="ECE Dept", Supplier 1=Farnell, Viewing Angle=120°, Wavelength Typ=470
F1: library part FS_Fuse_5.0A, "Fuse 5.0A Fast Acting 1206 SMD", Case/Package=1206, Case Code (Metric)=3216, DC Cold Resistance=19mR, Manufacturer="Bel TRP", Manufacturer Part Number=C1F5, Max Operating Temperature=125°C, Min Operating Temperature=-55°C, Supplier Part Number 1=507-1886-1-ND, Voltage Rating=125V, Voltage Rating (DC)=63V, Approvals=CE,cURus, Case Code (Imperial)=1206, ComponentLink1Description=http://www.farnell.com/datasheets/2571625.pdf, ComponentLink1URL=http://www.farnell.com/datasheets/2571625.pdf, ComponentLink2Description=http://belfuse.com/pdfs/C1F.pdf, ComponentLink2URL=http://belfuse.com/pdfs/C1F.pdf, ComponentLink3Description=http://www.mouser.com/ds/2/643/C1F-594910.pdf, ComponentLink3URL=http://www.mouser.com/ds/2/643/C1F-594910.pdf, ComponentLink4Description=https://belfuse.com/resources/StewartConnector/C1F.pdf, ComponentLink4URL=https://belfuse.com/resources/StewartConnector/C1F.pdf, Contact Plating=Nickel,Tin, Current Rating=5A, Fuse Type="Board Mount (Cartridge Style Excluded)", Length=0.126inch, Mount="Surface Mount", Number of Pins=2, Packaging="Tape and Reel", Pricing 1="1=0.32, 5=0.312, 10=0.298, 50=0.2662, 100=0.2479, 250=0.22032, 500=0.1836, 1000=0.17442 (USD)", Stock 1=725, Supplier 1=Digi-Key, Supplier 2=Element14, Supplier Part Number 2=2848595, Voltage Rating (AC)=125V, Width=0.062inch
H1: library part JS_USB_MICRO_B_SMT, "CONN USB MICRO B RECPT SMT R/A", Manufacturer=FCI, Manufacturer Part Number=10118194-0001LF, Supplier Part Number 1=609-4618-1-ND, Features="Shielded, Solder Retention", Gender=Receptacle, Mounting Type="Surface Mount, Right Angle, Horizontal", Number of Contacts=5, Specifications="USB 2.0", Supplier 1=Digi-Key
H2: library part JA_HDR_IDC_5X2_VERT, "IDC Header, 2,54mm, 10-Pin, Vert", Supplier Part Number 1=1096985, Storage Location="ECE Dept Store", Supplier="ECE Dept", Supplier 1=Farnell
H3: "3Pin Header 2.54mm spacing"
H4: library part JA_MOLEX_KK_2POS, "CONN HEADER 2POS 2.54mm VERT_Thru Hole", Supplier Part Number 1=1462926, Storage Location="ECE Dept Store", Supplier="ECE Dept", Supplier 1=Farnell
H5: library part JA_MOLEX_KK_10POS, "CONN HEADER 10POS 2.54mm VERT_ Thru Hole", Supplier Part Number 1=1756828, Storage Location="ECE Dept Store", Supplier="ECE Dept", Supplier 1=Farnell
J1 J2 J3 J4: library part TP_JUMPER, "2.54mm Jumper Thru Hole", Supplier Part Number 1=1097975, No. of Positions=2, No. of Rows=1, Pitch Spacing=2.54, Storage Location="ECE$ Store", Supplier="ECE Dept", Supplier 1=Farnell
L1 L3: library part IN_Ferrite-Bead, "Ferrite Bead, Rdc 0.3R, Z100MHZ 600R, Imax 1A, SMD 1206", DC Current Rating=1, DC Resistance Max=0.08, Ferrite Case Style="1206 ^3216 Metric]", Frequency Range="50MHz to 1", Impedance Tolerance="± 25%", Manufacturer=FAIR-RITE, Manufacturer Part Number=2512066017Y1, Supplier Part Number 1=1612060, Ferrite Mounting=SMD, Impedance=600, Manufacturer PN=2512066017Y1, Storage Location="PCB Assembly WS", Supplier="ECE Dept", Supplier 1=Farnell
L2: library part CDRH104RNP-5R2NC, "FIXED IND 5.2UH 6A 22 MOHM SMD", Current - Saturation=5.6A, DC Resistance (DCR)="22 mOhm Max", Frequency - Self Resonant=-, Manufacturer="Sumida America Components Inc.", Operating Temperature="-40°C ~ 100°C", Package / Case=Nonstandard, Supplier Part Number 1=308-2280-1-ND, Tolerance=±30%, Category="Inductors, Coils, Chokes", ComponentLink1Description=http://products.sumida.com/products/pdf/CDRH104R.pdf, ComponentLink1URL=http://products.sumida.com/products/pdf/CDRH104R.pdf, Height - Seated (Max)="0.157\" (4.00mm)", Manufacturer Part Number=CDRH104RNP-5R2NC, Material - Core=Ferrite, Mounting Type="Surface Mount", Packaging="Cut Tape (CT)", Part Status=Active, Pricing 1="1=2.9, 10=2.678, 100=1.8743, 500=1.5173 (NZD)", Q @ Freq=-, Ratings=-, RoHS="RoHS Compliant", Shielding=Shielded, Size / Dimension="0.402\" L x 0.394\" W (10.20mm x 10.00mm)", Stock 1=3849, Supplier 1=Digi-Key, Supplier Device Package=-, Type=-
P1: "Header, 10-Pin, Dual row", LatestRevisionDate=17-Jul-2002, LatestRevisionNote="Re-released for DXP Platform.", Publisher="Altium Limited"
P2: library part MHDR1X3, "Header, 3-Pin", LatestRevisionDate=17-Jul-2002, LatestRevisionNote="Re-released for DXP Platform.", Publisher="Altium Limited"
Q1: library part TM_SSM3J328R, "MOSFET P-CH 20V 6A SOT23-3", Case/Package=SOT-23-3, Continuous Drain Current (ID)=6A, Drain to Source Breakdown Voltage=-20V, Drain to Source Resistance=47.4mR, Drain to Source Voltage (Vdss)=20V, Gate to Source Voltage (Vgs)=8V, Input Capacitance=840pF, Input Capacitance (Ciss) @ Vds="840pF @ 10V", Manufacturer=Toshiba, Max Operating Temperature=150°C, Max Power Dissipation=1W, Min Operating Temperature=-55°C, Package / Case="SOT-23-3 Flat Leads", Package Quantity=3000, Power Dissipation=2W, Supplier Device Package=SOT-23F, Supplier Part Number=SSM3J328RLFDKR-ND, ComponentLink1Description=https://datasheet.ciiva.com/11158/ssm3j328r-datasheet-en-20140301-11158652.pdf, ComponentLink1URL=https://datasheet.ciiva.com/11158/ssm3j328r-datasheet-en-20140301-11158652.pdf, Current - Continuous Drain (Id) @ 25° C=6A, Element Configuration=Single, FET Feature="Logic Level Gate, 1.5V Drive", FET Type="MOSFET P-Channel, Metal Oxide", Gate Charge (Qg) @ Vgs="12.8nC @ 4.5V", Manufacturer Part Number=SSM3J328R,LF, Mount="Surface Mount", Number of Channels=1, Number of Elements=1, Number of Pins=3, Packaging="Tape and Reel", Power - Max=1W, Pricing="1=0.79, 10=0.658, 25=0.5772, 100=0.4939, 250=0.42836, 500=0.36284, 1000=0.27972 (NZD)", Radiation Hardening=No, Rds On Max=29.8mR, Storage Location="PCB Assembly WS", Supplier=Digi-Key, Supplier 1=Digi-Key, Supplier Part Number 1=SSM3J328RLFDKR-ND, Turn-Off Delay Time=107ns, Turn-On Delay Time=32ns, Vgs(th) (Max) @ Id="1V @ 1mA"
Q2: library part TB_BC817W, "NPN GP Bipolar Transistor 45V 500mA SOT323", Manufacturer=NXP, Supplier Part Number 1=2114873, Manufacturer PN=BC817W, Storage Location="PCB Assembly WS", Supplier="ECE Dept", Supplier 1=Farnell
R1 R2: library part RS_27R, "RES 27 OHM 1/10W 5% 0603 SMD", Storage Location="PCB Assembly WS", Supplier="ECE Dept"
R3 R4: library part RS_27K, "RES 27K OHM 1/10W 5% 0603 SMD", Storage Location="PCB Assembly WS", Supplier="ECE Dept"
R5 R11: library part RT_1R, "RES 1R OHM 1/4W 5% 1206 SMD", Storage Location="PCB Assembly WS", Supplier="ECE Dept"
R6 R12 R31 R34: library part RS_0R0, "RES 0.0 OHM 1/10W 5% 0603 SMD", Storage Location="PCB Assembly WS", Supplier="ECE Dept"
R7 R16 R17 R19 R21 R23 R25 R26 R27 R28 R29 R35 R36 R37: library part RS_750R, "RES 750 OHM 1/10W 5% 0603 SMD", Storage Location="PCB Assembly WS", Supplier="ECE Dept"
R8 R32: library part RS_100K, "RES 100K OHM 1/10W 5% 0603 SMD", Storage Location="PCB Assembly WS", Supplier="ECE Dept"
R9 R10: library part RS_4K7, "RES 4.7K OHM 1/10W 5% 0603 SMD", Storage Location="PCB Assembly WS", Supplier="ECE Dept"
R13 R14: library part RS_10K, "RES 10.0K OHM 1/10W 5% 0603 SMD", Storage Location="PCB Assembly WS", Supplier="ECE Dept"
R15: library part RS_10R, "RES 10 OHM 1/10W 5% 0603 SMD", Storage Location="PCB Assembly WS", Supplier="ECE Dept"
R18 R24 R30 R33: library part RS_1K, "RES 1.0K OHM 1/10W 5% 0603 SMD", Storage Location="PCB Assembly WS", Supplier="ECE Dept"
R20: library part RS_56K, "RES 56.0K OHM 1/10W 5% 0603 SMD", Storage Location="PCB Assembly WS", Supplier="ECE Dept"
S1 S2 S3: library part WS_EVQPNF05M, "Panasonic 6 x 3.5mm SMD Light Touch Switch Type SMD", Manufacturer=Panasonic, Supplier Part Number 1=2079481, Manufacturer PN=EVQPNF05M, PackageDescription="6.0 x 3.5 mm", Storage Location="PCB Assembly WS", Supplier="ECE Dept", Supplier 1=Farnell, Supplier 2=Digi-Key, Supplier Part Number 2=P13598SCT-ND
TP1 TP2 TP3 TP5 TP6 TP7 TP11 TP13: library part TP_1206, "Test-Point 3.3x1.6x2.1mm SMD", Manufacturer="Harwin Inc", Manufacturer Part Number=S1751-46R, Supplier Part Number 1=952-1478-2-ND, Mounting Type="Surface Mount", Storage Location=ProtoPlace, Supplier="ECE Dept", Supplier 1=Digi-Key, Supplier 2=Farnell, Supplier Part Number 2=1826282, Type="PC Test Point"
U1: library part SE_ATSAM4S16BA-MU, "IC MCU 32BIT 512KB FLASH 64LQFP", Manufacturer=Atmel, Package / Case=64-LQFP, Supplier Part Number 1=ATSAM4S8BA-ANRCT-ND, Voltage - Supply (Vcc/Vdd)="1.62 V ~ 3.6 V", Code_JEDEC=MO-220VMMD-3, ComponentLink1Description="Manufacturer URL", ComponentLink1URL=http://www.atmel.com/, ComponentLink2Description="SAM4S Series Datasheet", ComponentLink2URL=http://www.atmel.com/dyn/resources/prod_documents/11100.pdf, ComponentLink3Description="SAM4S Series Summary", ComponentLink3URL=http://www.atmel.com/dyn/resources/prod_documents/11100S.pdf, Connectivity="I²C, IrDA, Memory Card, SPI, SSC, UART/USART, USB", Core Processor="ARM® Cortex®-M4", Core Size=32-Bit, Data Converters="A/D 11x12b, D/A 2x12b", Manufacturer Part Number=ATSAM4S8BA-ANR, Number of I/O=47, PackageDescription="64-Pin Quad Flat No-Lead (QFN) Sawn, 9 x 9 x 1.0 mm Body, 0.5 mm Pitch, Exposed Pad", PackageReference=64PS, PackageVersion="revJ, Jul-2007", Packaging="Cut Tape (CT)", Peripherals="Brown-out Detect/Reset, DMA, POR, PWM, WDT", Program Memory Size="512KB (512K x 8)", Program Memory Type=FLASH, RAM Size="128K x 8", Speed=120MHz, Supplier 1=Digi-Key
U2 U5: library part SV_CAT6219-330TDGT3, "IC REG LIN 3.3V 500MA TSOT23-5", Base Part Number=CAT6219, Current - Output=500mA, Package / Case="SOT-23-5 Thin, TSOT-23-5", Supplier Device Package=TSOT-23-5, Supplier Part Number=CAT6219-330TDGT3CT-ND, Voltage - Input (Max)=5.5V, Voltage - Output (Min/Fixed)=3.3V, Voltage Dropout (Max)="0.5V @ 500mA", ComponentLink1Description=http://www.onsemi.com/pub/Collateral/CAT6219-D.PDF, ComponentLink1URL=http://www.onsemi.com/pub/Collateral/CAT6219-D.PDF, Manufacturer Part Number=CAT6219-330TDGT3, Supplier=Digi-Key, Supplier 1=Digi-Key
U3: library part ADP2302ARDZ-5.0-R7, "IC REG BUCK 5V 2A 8SOIC", Current - Output=2A, Frequency - Switching=700kHz, Supplier Part Number 1=ADP2302ARDZ-5.0-R7CT-ND, Voltage - Input (Max)=20V, Voltage - Output (Min/Fixed)=5V, Manufacturer_Part_Number=ADP2302ARDZ-5.0-R7, Output Type=Fixed, Supplier 1=Digi-Key, Type=DEV, Vendor="Analog Devices Inc"
U4: "9 axis IMU"
U6: library part NRF24, "nRF24 SMD Module", Warning="No power planes near or under device"
U7: "1.8V - 5V level converter"
VR1: "JOYSTICK 10K OHM 2 AXIS TH", Manufacturer 1=SparkFun, Manufacturer Part Number 1=COM-09032, Supplier Part Number 1=1568-1526-ND, ComponentLink1Description=https://media.digikey.com/pdf/Data%20Sheets/Sparkfun%20PDFs/COM-09032_Web.pdf?src-supplier=Digi-Key, ComponentLink1URL=https://media.digikey.com/pdf/Data%20Sheets/Sparkfun%20PDFs/COM-09032_Web.pdf?src-supplier=Digi-Key, Pricing 1="1=3.95000 (USD)", RoHS=No, Stock 1=563, Supplier 1=Digi-Key
Y1: library part XT_CRYSTAL_12MHz_18pF, "CRYSTAL 12MHZ 18PF 6X3.5mm SMD", ESR (Equivalent Series Resistance)="60 Ohm", Frequency Stability=±50ppm, Frequency Tolerance=±30ppm, Load Capacitance=18pF, Manufacturer="CTS-Frequency Controls", Manufacturer Part Number=406C35D12M00000, Operating Mode=Fundamental, Operating Temperature="-20°C ~ 70°C", Package / Case="4-SMD, No Lead (DFN, LCC)", Supplier Part Number 1=CTX855CT-ND, Frequency=12MHz, Height="0.047\" (1.20mm)", Mounting Type="Surface Mount", Size / Dimension="0.236\" L x 0.138\" W (6.00mm x 3.50mm)", Supplier 1=Digi-Key

## Via types
v1: diameter 0.6, hole 0.3, Top Side to Bottom Side, 102 vias
v2: diameter 1, hole 0.5, Top Side to Bottom Side, 22 vias
v3: diameter 1.3, hole 1.1, Top Side to Bottom Side, 1 vias
v4: diameter 2, hole 1.5, Top Side to Bottom Side, 1 vias

## Nets (pads, with @x,y where several pads share a name; then routed paths per layer and width w, separated by ;. In a path a pad name is that pad's centre, name@x,y a point inside that pad or via, vN(x,y) a via of type N, cw(c..) or ccw(c..) an arc to the next point about the centre after c; other vN are vias at no path point)
3V3: C5.2 C6.2 C7.2 C8.2 C9.2 C20.1 C21.1 C29.2 H2.7 H2.8 H5.1 H5.9 J1.2 J2.2 J3.2 J4.2 P1.4 R6.2 R9.2 R10.2 TP1.1 U1.1 U1.7 U1.18 U1.45 U1.58 U4.1 U4.8 U4.13 U4.22 U7.6 VR1.1 VR1.4 | length 54.5
  Top Side w0.16: U1.18@26.475,63.25 26.479,63.246 27.813,63.246 v1(28.321,62.738) ; v1(28.321,47.498) R9.2@28.321,49.161 ; v1(32.385,63.373) 32.385,64.508 U1.7@32.707,64.83 ; U1.7@32.75,65.525 U1.7@32.766,65.509 ; U1.45@34.25,54.475 34.25,55.127 35.097,55.974 35.628,55.974 v1(35.712,56.058) ; R10.2@35.052,45.72 36.068,44.704 v1@37.084,44.704 ; v1(35.941,59.563) 36.025,59.647 36.025,59.902 36.873,60.75 U1.58@37.525,60.75 ; v1(40.005,38.227) 40.005,36.76 41.61,35.155 42.823,35.155 U4.22@42.843,35.135 ; v1(44.577,40.386) 44.577,40.259 45.993,38.843 U4.13@45.993,37.535 ; U4.8@47.143,34.735 47.163,34.715 48.698,34.715 49.047,34.366 49.047,33.136 C21.1@48.946,33.034 ; v2(47.32,32.918) v2@47.436,33.034
  Top Side w0.3: v2@15.487,34.018 v2(15.494,34.011) ; U7.6@31.312,3.622 31.369,3.565 v2(31.369,1.524) ; v1(35.61,63.5) 35.61,63.581 35.75,63.721 U1.1@35.75,65.525 ; U4.1@43.993,33.135 43.993,31.036 C20.1@43.818,30.861 44.468,30.861 45.357,29.972 v1(46.609,29.972) ; v2@47.436,33.034 C21.1@48.946,33.034
  Top Side w0.6: v2@15.487,34.018 C29.2@15.487,36.333 ; R6.2@23.368,43.18 25.019,44.831 v1(25.019,46.228)
  Bottom Side w0.16: v1(28.321,62.738) 28.321,62.646 C6.2@29.369,61.598 ; v1(32.385,63.373) 33.1,62.658 C5.2@33.1,61.852 ; C5.2@33.129,61.598 C5.2@33.179,61.598 ; C7.2@34.325,56.388 34.975,56.388 35.305,56.058 v1(35.712,56.058) ; C8.2@34.325,58.928 35.306,58.928 v1(35.941,59.563)
  Bottom Side w0.2: v1(36.862,44.771) 36.878,44.755 TP1.1@40.361,44.755
  Bottom Side w0.3: C9.2@34.449,61.66 35.61,62.821 v1(35.61,63.5)
3V3_Radio: L3.2 R11.2 TP13.1 | length 10.4
  Top Side w0.3: L3.2@2.032,59.412 3.957,59.412 R11.2@5.156,58.213 7.743,58.213 v2(7.823,58.293)
  Bottom Side w0.3: v2@7.783,58.253 v2(7.823,58.293) 8.712,59.182 TP13.1@11.43,59.182
5V: C1.2 C24.2 D2.2 D3.2 H4.1 R13.2 TP5.1 U2.1 U2.3 U5.1 U5.3 | length 48.8
  Top Side w0.3: TP5.1@19.228,30.328 19.304,30.404 v2(19.304,34.544) 19.304,36.068 20.494,37.258 U2.1@21.402,37.258 C1.2@21.402,35.31 ; C1.2@21.144,35.052 C1.2@21.336,35.244 C1.2@21.402,35.31 ; C1.2@21.511,35.419 C1.2@21.402,35.31 ; U2.3@23.302,37.258 23.302,35.307 23.876,34.733 v2(23.876,34.544)
  Top Side w0.6: H4.1@5.359,47.498 8.026,50.164 10.477,50.164 v2(12.446,52.133) ; U5.1@7.446,52.39 C24.2@8.836,52.39 ; U5.3@7.446,54.29 7.446,55.833 v1(7.493,55.88) ; C24.2@9.144,52.132 11.849,52.132 ; D2.2@30.099,25.862 31.476,24.485 32.411,24.485 v2(33.401,23.495) ; v2(35.687,36.449) 37.211,34.925 D3.2@37.211,32.812
  Bottom Side w0.6: v2(12.446,52.133) 12.446,52.07 19.736,44.78 v1(19.736,43.536) ; v2@40.259,23.749 v2(40.259,23.876)
5V_BUCK: D3.1 P2.1 R12.2 U7.1 | length 39
  Top Side w0.3: U7.1@33.712,3.622 U7.1@33.782,3.552
  Top Side w0.6: U7.1@33.782,3.552 v1(33.782,1.524) P2.1@37.846,1.524 ; D3.1@37.211,25.862 37.084,25.735 R12.2@37.084,22.479 38.989,22.479 v1(41.148,20.32)
  Bottom Side w0.6: v1(33.782,1.524) 35.56,3.302 39.878,3.302 41.148,4.572 v1(41.148,20.32)
BAT: C28.2 F1.1 H3.2 | length 8.5
  Top Side w1.2: H3.2@14,6.54 14.225,6.54 15.889,8.204 18.327,8.204 C28.2@18.403,8.128 C28.2@17.678,8.128 ; v2(16.256,2.032) F1.1@18.87,2.032
BAT_VOLTAGE: C26.2 R20.2 R32.1 U1.16 | length 76.7
  Top Side w0.2: C26.2@27.799,68.405 28.25,67.954 U1.16@28.25,65.525
  Top Side w0.3: v1(24.384,69.596) 27.258,69.596 27.574,69.28 27.574,68.63 C26.2@27.624,68.58 C26.2@27.799,68.405 ; v1(26.416,45.085) 26.416,43.942 26.796,43.562 26.796,41.021 25.585,39.81 25.585,25.087 30.099,20.573 30.099,13.843 29.189,12.933 R32.1@28.956,12.933 R20.2@28.956,10.402
  Bottom Side w0.3: v1(24.384,69.596) 23.622,69.596 21.498,67.472 21.498,56.226 23.368,54.356 23.368,53.34 21.169,51.141 21.169,49.442 22.365,48.245 24.898,48.245 26.094,47.049 26.094,46.269 26.416,45.947 v1(26.416,45.085)
BUCK: C17.2 Q1.2 R8.1 R32.2 U3.2 U3.3 | length 33.3
  Top Side w0.3: 23.876,24.765 24.13,25.019 ; 26.99,14.466 28.448,14.466
  Top Side w0.6: U3.2@21.311,24.865 21.357,24.911 22.879,24.911 23.304,25.336 ; U3.3@21.311,26.135 21.357,26.089 22.679,26.089 23.368,25.4 ; 24.13,25.019 R8.1@24.13,26.809 ; C17.2@24.676,19.939 26.99,19.939
  Top Side w1.2: 23.304,25.336 23.876,24.765 26.99,21.651 26.99,19.939 26.99,14.466 Q1.2@26.99,4.048
BUTTON: S2.1 U1.44 | length 49.9
  Top Side w0.2: S2.1@2.794,31.46 2.794,32.131 4.064,33.401 6.096,33.401 7.112,34.417 7.112,40.132 8.128,41.148 16.002,41.148 16.891,42.037 16.891,43.434 v1(24.257,50.8) ; U1.44@33.75,54.475 33.75,50.451 v1(34.544,49.657)
  Bottom Side w0.2: v1(24.257,50.8) 33.401,50.8 v1(34.544,49.657)
BUZZER: R14.2 R15.1 TP11.1 U1.33 | length 24.7
  Top Side w0.3: R15.1@15.482,42.672 R14.2@15.482,44.704 19.038,48.26 ; TP11.1@16.764,51.689 16.764,49.149 17.653,48.26 19.038,48.26 ; U1.33@28.25,54.475 28.25,53.269 26.797,51.816 22.594,51.816 19.038,48.26